# Altium PCB PCB1.PcbDoc
Units mm, origin at the board's own origin, x right, y up, seen from the top; angles counter-clockwise.
Board outline 143 x 38 mm, 2 copper layers (Component Side, Bottom Layer), stack 0.325 mm thick; 67 components, 41 nets, 195 pads, 0 vias.
Unrouted connection lines stored in the file: 3.
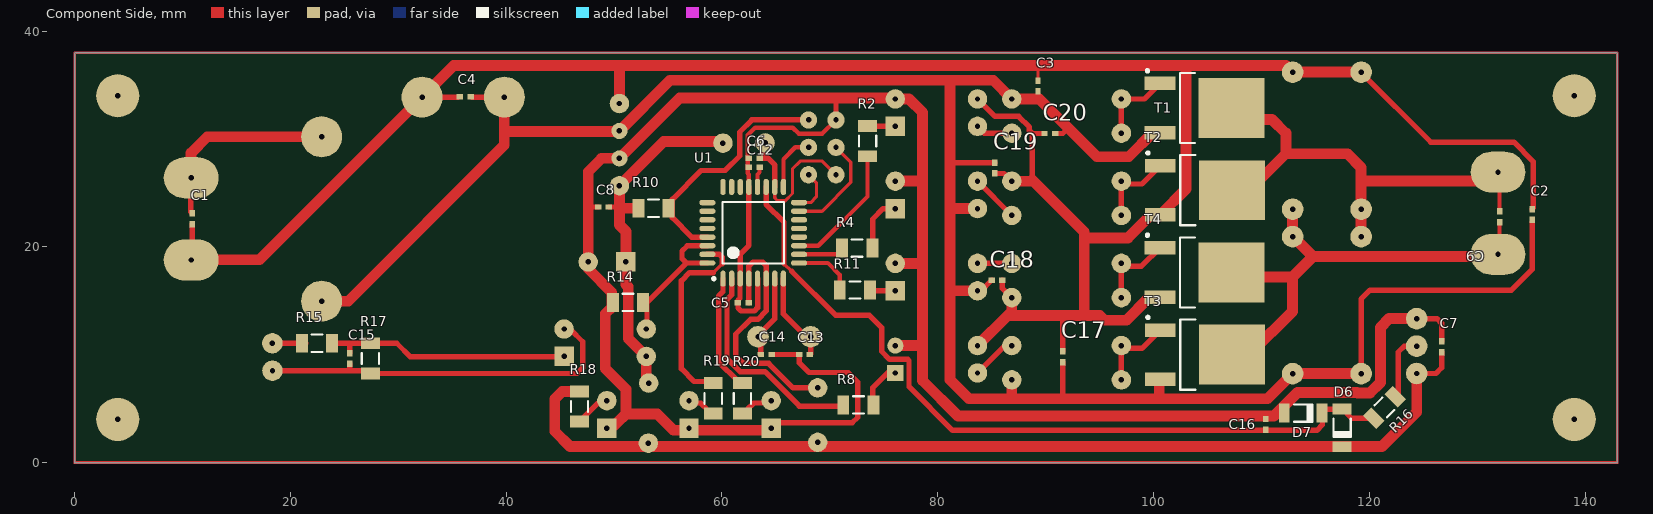
[diagram p0: Component Side view]
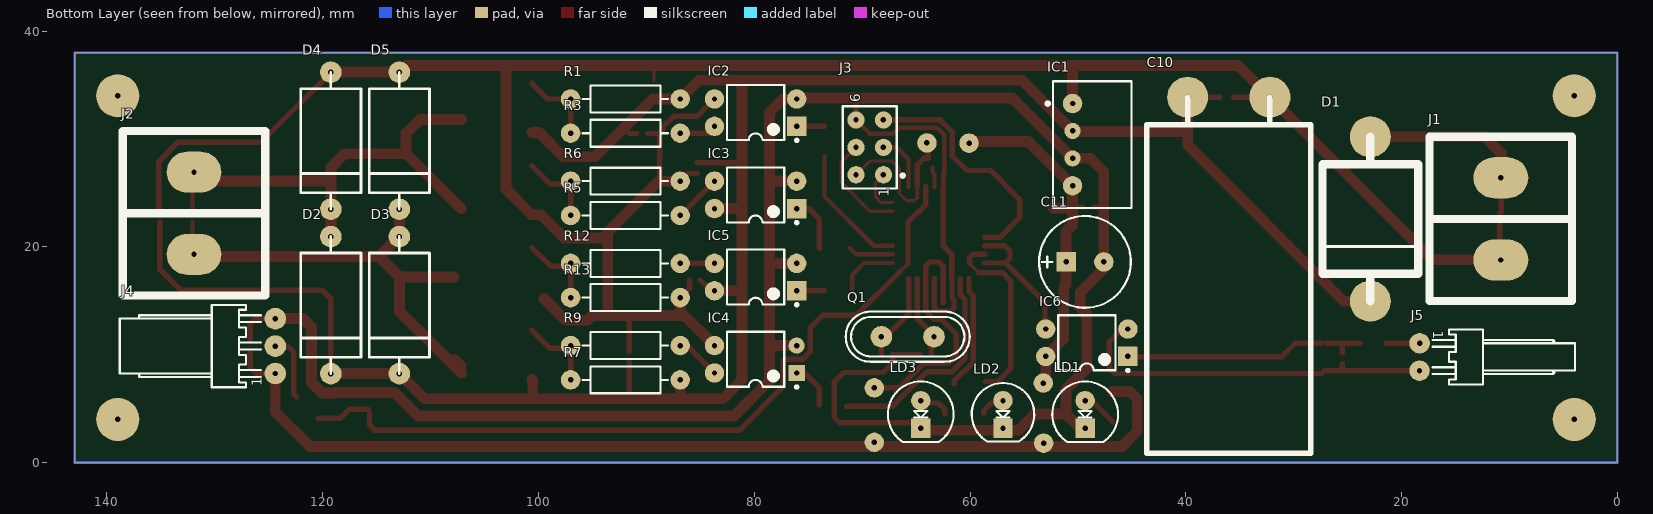
[diagram p1: Bottom Layer view, seen from below]
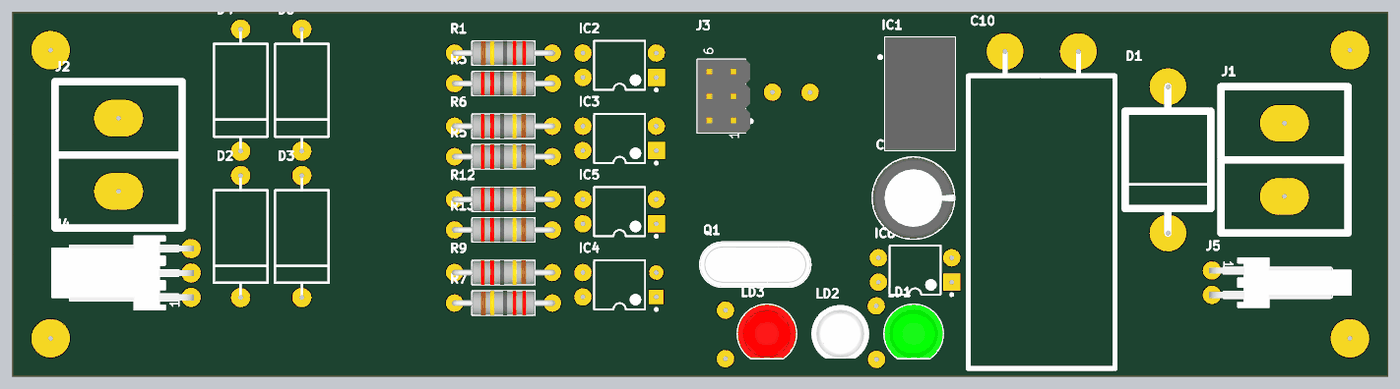
[diagram p2: 3D render of the assembled board from below, using the file's embedded part models]

## Layer stack, top to bottom
Top Solder: solder mask 0.0102, Solder Resist, Dk 3.5
Component Side: signal copper 0.0356
Dielectric 1: core 0.254, FR-4, Dk 4.2
Bottom Layer: signal copper 0.0356
Solder Side: solder mask 0.0102, Solder Resist, Dk 3.5

## Board outline
0,0 0,38 143,38 143,0

## Design rules (kind name [scope] priority, off if disabled: settings)
Clearance [All] p1: gap=0.27 ignorepadtopadclearanceinfootprint=FALSE
PolygonConnect [All] p1: connectstyle=Relief reliefconductorwidth=0.254 reliefentries=4 polygonreliefangle="90 Angle" airgapwidth=0.254
RoutingVias [All] p1: holewidth=0.711 width=1.27 viastyle="Through Hole" minholewidth=0.711 minwidth=1.27 maxholewidth=0.711 maxwidth=1.27
SolderMaskExpansion [All] p1: expansion=0.102
Width [All] p1: maxlimit=5.08 minlimit=0.254 preferedwidth=1.016
30 further rules are at their usual default settings.

## Components (designator, comment, footprint, x,y, rotation, side; value= is the part's Value field where it differs from the comment)
C1 "0.1" 0402 10.9,22.6 r90 top
C2 "0.1" 0402 135.1,23 r270 top
C3 "0.1" 0402 89.3,34.9 r270 top
C4 "0.1" 0402 36.2,33.9 r0 top
C5 "0.1" 0402 61.98,14.82 r0 top
C6 "0.1" 0402 63,28.22 r0 top
C7 "0.1" 0402 126.71,10.73 r270 top
C8 "0.1" 0402 49.03,23.69 r0 top
C9 "0.1" 0402 132.08,22.775 r90 top
C10 "25v 4700µ" Cap25v4700mkf 39.83,33.87 r270 bottom
C11 "10v 1000µ" CAPPR350W80D850H1300 49.35,18.6 r180 bottom
C12 "0.1" 0402 62.99,27.36 r0 top
C13 "22p" 0402 67.66,10.02 r0 top
C14 "22p" 0402 64.11,10.02 r180 top
C15 "10n" 0402 25.505,9.655 r90 top
C16 "0.1" 0402 110.39,3.54 r270 top
C17 "0.1" 0402 91.6,9.8 r270 top
C18 "0.1" 0402 85.5,16.9 r180 top
C19 "0.1" 0402 85.3,27.3 r90 top
C20 "0.1" 0402 90.4,30.5 r0 top
D1 "10A10" 10A10 22.9,14.96 r90 bottom
D2 "FR307" DO-27 119.25,8.245 r90 bottom
D3 "FR307" DO-27 112.9,8.245 r90 bottom
D4 "FR307" DO-27 119.25,23.485 r90 bottom
D5 "FR307" DO-27 112.9,23.485 r90 bottom
D6 "Device" DIOMELF3515N 117.49,3.21 r90 top
D7 "Device" DIOMELF3515N 113.88,4.58 r180 top
IC1 "Device" DCDC_TRACO_TME24 50.5,29.47 r270 bottom
IC2 "FL817" DIP-4#1 79.88,32.435 r0 bottom
IC3 "FL817" DIP-4#1 79.88,24.815 r0 bottom
IC4 "FL817" DIP-4#2 79.88,9.575 r0 bottom
IC5 "FL817" DIP-4#1 79.88,17.195 r0 bottom
IC6 "FL817" DIP-4#1 49.18,11.11 r0 bottom
J1 "Main Power" PwrCon 10.8,26.4 r270 bottom locked
J2 "Motor" PwrCon 131.935,26.92 r270 bottom locked
J3 "ISP Prog" COMATEL_389.0358.1.06.400 69.3,29.22 r90 bottom
J4 "Angle Sensor" MOLEX_22-05-7038 124.4,10.8 r90 bottom locked
J5 "Input Signal" MOLEX_22-05-7028 18.335,9.79 r270 bottom locked
LD1 "Color" LED_5MM_GREEN_1C-2A 49.33,4.47 r90 bottom
LD2 "Color" LED_VISHAY_TSAL6200 56.95,4.47 r90 bottom
LD3 "Color" LED_5MM_RED_1C-2A 64.57,4.47 r90 bottom
Q1 "8Mhz" XTAL_HC-49/U 65.78,11.67 r180 bottom
R1 "1k" RES1016-650X250 91.945,33.705 r180 bottom
R2 "1k" RESC3116X65N 73.5,29.8 r90 top
R3 "510om" RES1016-650X250 91.945,30.53 r0 bottom
R4 "1k" RESC3116X65N 72.54,19.88 r0 top
R5 "1k" RES1016-650X250 91.945,22.91 r0 bottom
R6 "1k" RES1016-650X250 91.945,26.085 r0 bottom
R7 "1k" RES1016-650X250 91.945,7.67 r180 bottom
R8 "1k" RESC3116X65N 72.65,5.35 r0 top
R9 "510om" RES1016-650X250 91.945,10.845 r0 bottom
R10 "10k" RESC3116X65N 53.66,23.57 r0 top
R11 "1k" RESC3116X65N 72.32,16 r0 top
R12 "1k" RES1016-650X250 91.945,18.465 r0 bottom
R13 "1k" RES1016-650X250 91.945,15.29 r0 bottom
R14 "1k" RESC3116X65N 51.3,14.85 r180 top
R15 "1k" RESC3116X65N 22.46,11.06 r0 top
R16 "1k" RESC3116X65N 121.42,5.1 r45 top
R17 "10k" RESC3116X65N 27.41,9.66 r90 top
R18 "1k" RESC3116X65N 46.8,5.2 r270 top
R19 "1k" RESC3116X65N 59.2,5.96 r270 top
R20 "1k" RESC3116X65N 61.9,5.96 r270 top
T1 "IRFR5305" TO228P991X239-3N-R546X521 104.745,32.865 r0 top
T2 "IRLR2905" TO228P991X239-3N-R546X521 104.785,25.245 r0 top
T3 "IRFR5305" TO228P991X239-3N-R546X521 104.785,10.005 r0 top
T4 "IRLR2905" TO228P991X239-3N-R546X521 104.745,17.625 r0 top
U1 "ATmega168PA-AU" 32A_M 62.9,21.3 r90 top

## Footprints (in the part's own frame and the unit in brackets; to place one, negate y for a bottom-side part, rotate by r counter-clockwise, add the part's x,y. Pads: shape width x height; smd on the part's side, far side on the other; paste and mask are expansions set on the pad)
10A10 [mm]
  round 3.81 hole 0.5: 1(0,0) 2(15.24,0)
  silkscreen extent 0,-4.45 15.24,4.44
32A_M [mm] "Thin QFP, 32-Leads, Body 7x7mm, Pitch 0.8mm, IPC Low Density"
  oval 1.5x0.5 smd: 1(-4.25,2.8) 2(-4.25,2) 3(-4.25,1.2) 4(-4.25,0.4) 5(-4.25,-0.4) 6(-4.25,-1.2) 7(-4.25,-2) 8(-4.25,-2.8) 17(4.25,-2.8) 18(4.25,-2) 19(4.25,-1.2) 20(4.25,-0.4) 21(4.25,0.4) 22(4.25,1.2) 23(4.25,2) 24(4.25,2.8)
  oval 0.5x1.5 smd: 9(-2.8,-4.25) 10(-2,-4.25) 11(-1.2,-4.25) 12(-0.4,-4.25) 13(0.4,-4.25) 14(1.2,-4.25) 15(2,-4.25) 16(2.8,-4.25) 25(2.8,4.25) 26(2,4.25) 27(1.2,4.25) 28(0.4,4.25) 29(-0.4,4.25) 30(-1.2,4.25) 31(-2,4.25) 32(-2.8,4.25)
  silkscreen extent -4.37,-2.85 2.85,3.77, body extent -3.5,-3.5 3.5,3.5, height 1.2
0402 [mm] "Chip Capacitor, Body 1.0x0.5mm, IPC High Density"
  rect 0.6x0.5 smd: 1(-0.5,0) 2(0.5,0)
  body extent -0.55,-0.3 0.55,0.3, height 1.3
Cap25v4700mkf [mm]
  round 3.81 hole 0.5: 1(0,0) 2(0,7.62)
  silkscreen extent 0,-3.81 33.02,11.43
CAPPR350W80D850H1300 [mm] "Capacitor, Radial, Pin spacing 3.5mm - Body Diameter 8.5mm x Body Height 13mm"
  rect 1.8x1.8 hole 0.5: 1(-1.75,0)
  round 1.8 hole 0.5: 2(1.75,0)
  silkscreen extent -4.25,-4.25 4.25,4.25, body extent -4.25,-4.25 4.25,4.25, height 13
COMATEL_389.0358.1.06.400 [mm] "6 Contacts - Pitch 2.54mm - Dual Row Straight Strip Header - Insulator 1.7mm"
  round 1.6 hole 0.5: 1(-2.54,-1.27) 2(-2.54,1.27) 3(0,-1.27) 4(0,1.27) 5(2.54,-1.27) 6(2.54,1.27)
  silkscreen extent -3.81,-3.2 3.81,2.5, body extent -3.81,-3 3.81,2.5, height 8
DCDC_TRACO_TME24 [mm] "TME Series , Body 11.75x7.25mm, SIP-4 Package"
  round 1.8 hole 0.5: 1(-3.81,0) 4(3.81,0)
  round 1.5 hole 0.5: 2(-1.27,0) 3(1.27,0)
  silkscreen extent -5.88,-2.45 5.88,5.45, body extent -5.87,-1.8 5.88,5.45, height 10.45
DIOMELF3515N [mm] "SOD80C, MELF Diode, 2-Leads, Body 3.5x1.5mm, IPC Medium Density"
  rect 1x1.75 smd: 1(-1.75,0) 2(1.75,0)
  silkscreen extent -0.85,-0.8 0.85,0.8, body extent -1.85,-0.8 1.85,0.8, height 1.6
DIP-4#1 [mm] "DIP; 4 Leads; Row Spacing 7.62 mm; Pitch 2.54 mm"
  rect 1.8x1.8 hole 0.5: 1(-3.81,1.27)
  round 1.8 hole 0.5: 2(-3.81,-1.27) 3(3.81,-1.27) 4(3.81,1.27)
  silkscreen extent -3.93,-2.55 2.65,2.69, body extent -3.15,-2.5 3.15,2.5, height 5.6
DIP-4#2 [mm] "DIP; 4 Leads; Row Spacing 7.62 mm; Pitch 2.54 mm"
  rect 1.5x1.5 hole 0.5: 1(-3.81,1.27)
  round 1.5 hole 0.5: 2(-3.81,-1.27)
  round 1.8 hole 0.5: 3(3.81,-1.27) 4(3.81,1.27)
  silkscreen extent -3.93,-2.55 2.65,2.69, body extent -3.15,-2.5 3.15,2.5, height 5.6
DO-27 [mm]
  round 2 hole 0.5: 1(0,0) 2(12.7,0)
  silkscreen extent 0,-2.79 12.7,2.79
LED_5MM_GREEN_1C-2A [mm] "LED, Green, Body Dia. 5.08mm, Pin spacing 2.54mm"
  rect 1.8x1.8 hole 0.5: 1(-1.27,0)
  round 1.8 hole 0.5: 2(1.27,0)
  silkscreen extent -2.56,-3.05 3.05,3.05, body extent -2.54,-3.05 3.05,3.05, height 14.34
LED_5MM_RED_1C-2A [mm] "LED, Red, Body Dia. 5.08mm, Pin spacing 2.54mm"
  rect 1.8x1.8 hole 0.5: 1(-1.27,0)
  round 1.8 hole 0.5: 2(1.27,0)
  silkscreen extent -2.56,-3.05 3.05,3.05, body extent -2.54,-3.05 3.05,3.05, height 14.34
LED_VISHAY_TSAL6200 [mm] "5mm Infrared Emitting Diode, VISHAY TSAL"
  rect 1.8x1.8 hole 0.5: 1(-1.27,0)
  round 1.8 hole 0.5: 2(1.27,0)
  silkscreen extent -2.5,-2.9 2.9,2.9, body extent -2.5,-2.9 2.9,2.9, height 13.7
MOLEX_22-05-7028 [mm] "2.54mm (.100\") Pitch KK® Wire-To-Board Header, Right Angle, With Friction Lock, 2 Circuits"
  round 1.9 hole 0.5: 1(-1.27,0.002) 2(1.27,-0.002)
  silkscreen extent -2.54,1.21 2.54,14.42, body extent -2.54,-0.32 2.54,14.42, height 5.84
MOLEX_22-05-7038 [mm] "2.54mm (.100\") Pitch KK® Wire-To-Board Header, Right Angle, With Friction Lock, 3 Circuits"
  round 2 hole 0.5: 1(-2.54,0) 2(0,-0.005) 3(2.54,0)
  silkscreen extent -3.81,1.31 3.81,14.42, body extent -3.81,-0.32 3.81,14.42, height 5.84
PwrCon [mm]
  oval 3.81x5.08 hole 0.5: 1(0,0) 2(7.62,0)
  silkscreen extent -3.81,-6.6 11.43,6.6
RES1016-650X250 [mm] "Resistor, Axial, Pad spacing 10.16 mm - Body Lengh 6.5mm X Body Diameter 2.5mm"
  round 1.8 hole 0.5: 1(-5.08,0) 2(5.08,0)
  silkscreen extent -3.95,-1.25 3.95,1.25, body extent -5.38,-1.27 5.38,1.26, height 2.51
RESC3116X65N [mm] "Chip Resistor, EIA 1206, Metric 3116, Body 3.1x1.55mm, IPC Medium Density"
  rect 1.1x1.75 smd: 1(-1.4,0) 2(1.4,0)
  silkscreen extent -0.5,-0.8 0.5,0.8, body extent -1.6,-0.85 1.6,0.85, height 0.65
TO228P991X239-3N-R546X521 [mm] "TO-252AA DPAK TO, 2.28mm pitch; 2 pin,9.905mm L X 6.095mm W X 2.39mm H body, IPC Medium Density"
  rect 2.85x1.25 smd: 1(-4.15,2.28) 2(-4.15,-2.28)
  rect 6.1x5.55 smd: 3(2.5,0)
  silkscreen extent -5.42,-3.25 -0.9,3.57, body extent -4.99,-3.27 4.95,3.27, height 2.28
XTAL_HC-49/U [mm] "HC-49/U Leaded Cristal, Body 11.05x4.8mm; Pitch 4.88mm"
  round 2 hole 0.5: 1(-2.44,0) 2(2.44,0)
  silkscreen extent -5.75,-2.33 5.75,2.33, body extent -5.75,-2.33 5.75,2.33, height 3.5

## Part data
C1 C2 C3 C4 C5 C6 C7 C8 C9 C12 C13 C14 C15 C16 C17 C18 C19 C20: library part "Capacitor - non polarized", "Non-polarised capacitor"
C10 C11: library part "Capacitor - polarized", "Polarised capacitor"
D1 D2 D3 D4 D5 D6 D7: library part Diode, "Diode"
IC1: library part DCDC_MURATA_MEE3, "1kV Isolated 3W Single Output DC-DC Converter"
IC2 IC3 IC4 IC5 IC6: library part "Optocoupler Type7", "Single Optocoupler"
J1: library part "Connector 2 Female"
J2: library part "Connector 2 Female", "Connector 2 Female"
J3: library part "Connector 6 Male", "Connector 6 Male"
J4: library part "Connector 3 Male", "Connector 3 Male"
J5: library part "Connector 2 Male", "Connector 2 Male"
LD1: library part "LED Green 1C 2A", "LED Green 1C 2A"
LD2: library part "LED Blue 1C 2A", "LED Blue 1C 2A"
LD3: library part "LED Red 1C 2A", "LED Red 1C 2A"
Q1: library part "Quartz Crystal", "Quartz Crystal"
R1 R2 R3 R4 R5 R6 R7 R8 R9 R10 R11 R12 R13 R14 R15 R16 R17 R18 R19 R20: library part Resistor, "Resistor"
T1 T3: library part "P-MOSFET-DZ 1G 2S 3D", "P-CHANNEL MOSFET WITH ZENER DIODE"
T2 T4: library part "N-MOSFET-DZ 1G 2S 3D", "N-CHANNEL MOSFET WITH ZENER DIODE"
U1: library part CMP-0095-00244-2, "8-bit AVR Microcontroller, 16KB Flash, 512 Bytes EEPROM, 1KB SRAM, 32-pin TQFP, Industrial Grade (-40°C to 85°C)", Code_JEDEC=MS-026-ABA, ComponentLink1Description="Manufacturer URL", ComponentLink1URL=http://www.atmel.com/, ComponentLink2Description="ATmega48A/48PA/88A/88PA/168A/168PA/328/328P Datasheet", ComponentLink2URL=http://www.atmel.com/dyn/resources/prod_documents/doc8271.pdf, ComponentLink3Description="ATmega48A/48PA/88A/88PA/168A/168PA/328/328P Summary", ComponentLink3URL=http://www.atmel.com/dyn/resources/prod_documents/8271S.pdf, DatasheetVersion="revD, May-2011", PackageDescription="32-Lead, 7x7x1.0 mm Body, 0.8mm Lead Pitch, Thin Profile Plastic Quad Flat Package (TQFP)", PackageReference=32A, PackageVersion="revC, Oct-2010", RevisionNote="DatasheetVersion & PackageVersion updated. URLs added."

## Free pads (board coordinates)
  round 1.8 hole 0.5: 0(68.88,6.93) 12(53.18,1.8) 12(53.214,7.37) 12(68.88,1.88) ""(60.09,29.61) ""(64,29.63)
  round 4 hole 0.5: 5(4,4) 5(139,4) 5(139,34) 6(4,34)

## Nets (pads, with @x,y where several pads share a name; then routed paths per layer and width w, separated by ;. In a path a pad name is that pad's centre, name@x,y a point inside that pad or via, vN(x,y) a via of type N, cw(c..) or ccw(c..) an arc to the next point about the centre after c; other vN are vias at no path point)
+5v: C5.2 C6.2 C7.2 C8.2 C11.1 D6.1 IC1.4 IC6.4 J3.2 J4.1 pad. pad.0 pad.12 R10.1 R18.1 U1.4 U1.6 U1.18 | length 167.4
  Component Side w0.3: U1.18 64.9,24.53 65.15,24.28 65.88,24.28 66.54,24.94 66.54,27.24 67.25,27.95 69.3,27.95 J3.2
  Component Side w0.5: C8.2 50.41,23.69 50.5,23.6 ; C5.2@62.5,14.82 U1.4 62.5,18.21 62.88,18.59 63.77,18.59 64.1,18.26 U1.6 64.1,14.056 63.324,13.28 62.66,13.28 61.28,11.9 61.28,9.93 62.01,9.2 64.33,9.2 66.6,6.93 pad.0 ; pad.@63.89,29.79 63.89,28.22 64.25,28.22 64.9,27.57 U1.18 ; J4.1 126.18,8.26 126.71,8.79 C7.2
  Component Side w1: R18.1 45.2,6.6 44.5,5.9 44.5,2.9 45.92,1.48 121.18,1.48 124.4,4.7 J4.1 ; R10.1 50.53,23.57 50.5,23.6 ; pad.12@53.214,7.37 52.99,7.51 IC6.4 51.32,11.51 51.32,16.294 51.1,16.514 C11.1 51.1,21.42 50.5,22.02 50.5,23.6 ; pad.@59.98,29.77 54.61,29.77 IC1.4 50.5,23.6
AnglSens: C16.2 D6.2 D7.1 R16.1 U1.19 | length 73.5
  Component Side w0.3: 65.75,18.448 66.47,17.728
  Component Side w0.5: U1.19 64.1,23.93 65.75,22.28 65.75,18.448 ; 66.47,17.728 70.558,13.64 73.67,13.64 74.8,12.51 74.8,10.319 75.544,9.575 77.035,9.575 77.04,9.57 77.21,9.57 77.34,9.44 77.34,7.04 81.39,2.99 115.14,2.99 115.67,3.52 115.67,4.76 115.87,4.96 117.51,4.96 118.36,4.11 R16.1
DGND: C5.1 C6.1 C7.1 C8.1 C11.2 C12.1 C13.1 C14.1 C16.1 D7.2 IC1.3 IC2.2 IC3.2 IC4.2 IC5.2 J3.6 J4.3 LD1.1 LD2.1 LD3.1 R14.2 U1.3 U1.5 U1.21 | length 220.7
  Component Side w0.4: U1.21 62.5,26.71 62.4,26.81 62.4,27.36 62.4,30.362 63.078,31.04 66.569,31.04 67.119,30.49 69.3,30.49 J3.6 ; 64.44,33.794 64.45,33.804 ; 69.25,33.804 69.3,33.754
  Component Side w0.5: 47.6,23.69 C8.1 ; LD1.1@49.689,3.085 49.689,2.981 LD1.1@49.69,2.582 ; 50.24,3.637 50.24,3.644 ; U1.21 62.5,20.125 61.7,19.325 U1.3 61.67,17.02 61.67,15.34 61.67,15.231 61.49,15.051 61.49,14.34 61.78,14.05 63.005,14.05 63.31,14.355 63.31,17.04 U1.5 ; LD3.1@64.53,2.98 65.255,3.705 72.075,3.705 72.59,4.19 72.59,7.47 71.71,8.35 68.08,8.35 67.16,9.27 C13.1 C14.1 ; J3.6 70.57,33.804 ; IC2.2@75.971,33.804 IC2.2 ; J4.3 126.28,13.34 126.71,12.91 C7.1
  Component Side w1: LD1.1@49.689,3.085 50.24,3.637 ; R14.2@49.795,14.645 49.795,15.765 47.6,17.96 C11.2 47.6,23.69 47.6,26.95 48.85,28.2 IC1.3 56.094,33.794 64.44,33.794 ; R14.2@49.92,14.52 49.19,13.79 49.19,8.71 51.1,6.8 51.1,4.504 ; 50.24,3.644 51.1,4.504 ; 64.45,33.804 69.25,33.804 70.57,33.804 IC2.2@75.971,33.804 ; LD3.1@64.53,3 55.504,3 54,4.504 51.1,4.504
  Component Side w1.016: IC4.2 78.545,10.845 78.61,10.91 ; IC5.2 78.61,18.465 ; IC3.2 78.61,26.085 ; IC2.2 77.34,33.705 78.61,32.435 78.61,26.085 ; J4.3 121.84,13.34 121.028,12.528 121.028,7.418 120.05,6.44 118.91,6.44 118.85,6.5 113.333,6.5 111.163,4.33 81.87,4.33 78.61,7.59 78.61,10.91 ; 78.61,10.91 78.61,18.465 ; 78.61,18.465 78.61,26.085
MISO: J3.1 U1.16 | length 4.2
  Component Side w0.3: U1.16 68.23,24.1 68.76,24.63 68.76,25.95 J3.1
MOSI: J3.4 U1.15 | length 9.7
  Component Side w0.3: U1.15 69.28,23.3 71.95,25.97 71.95,27.84 J3.4
MP1: C9.2 D2.2 D4.1 J2.1 T1.3 T2.3 | length 43.7
  Component Side w0.381: C9.2@132.08,23.337 J2.1@132.08,26.72
  Component Side w1.016: T1.3@107.145,31.8 110.995,31.8 112.265,30.53 112.265,28.625 ; T2.3@107.185,23.545 112.265,28.625 ; D2.2 D4.1 119.25,26.085 ; J2.1@130.68,26.72 130.045,26.085 119.25,26.085 ; 112.265,28.625 117.98,28.625 119.25,27.355 119.25,26.085
MP1EN: R2.1 U1.11 | length 12
  Component Side w0.4: U1.11 68.93,20.1 73.5,24.67 R2.1
MP1PWM: R4.1 U1.10 | length 4.2
  Component Side w0.4: U1.10 70.56,19.3 R4.1
MP2: C9.1 D3.2 D5.1 J2.2 T3.3 T4.3 | length 44.3
  Component Side w0.381: J2.2@132.08,19.1 C9.1
  Component Side w1.016: T3.3@107.145,8.305 110.955,12.115 ; T3.3@107.185,8.94 T3.3@107.82,9.575 ; T4.3@107.82,17.195 112.9,17.195 ; 110.995,12.115 112.9,14.02 112.9,17.195 ; D3.2 D3.2@112.9,21.005 ; D5.1@112.9,23.545 D5.1 D3.2@112.9,21.005 ; J2.2@130.68,19.1 114.805,19.1 ; 112.9,17.195 114.805,19.1 ; D3.2@112.9,21.005 114.805,19.1
MP2EN: R8.1 U1.2 | length 20.4
  Component Side w0.5: U1.2 60.9,15.55 60.47,15.12 60.47,9.639 61.679,8.43 63.992,8.43 67.182,5.24 R8.1@71.43,5.24
MP2PWM: R11.1 U1.9 | length 5.6
  Component Side w0.4: U1.9 69.82,18.5 70.92,17.4 R11.1
NetC12_2: C12.2 U1.20 | length 1.9
  Component Side w0.4: U1.20 63.3,26.71 63.49,26.9 C12.2
NetC13_2: C13.2 Q1.1 U1.8 | length 7.9
  Component Side w0.5: U1.8 65.7,13.78 Q1.1@67.765,11.715 ; C13.2 68.22,10.08 Q1.1
NetC14_2: C14.2 Q1.2 U1.7 | length 7.4
  Component Side w0.5: Q1.2 63.61,11.4 C14.2 ; Q1.2@63.51,11.95 64.9,13.34 U1.7
NetC15_1: C15.1 IC6.2 J5.2 R17.1 | length 34
  Component Side w0.5: J5.2@18.525,8.52 25.505,8.52 ; C15.1 25.505,8.52 ; IC6.2@45.49,12.31 45.99,12.31 47.1,11.2 47.1,8.8 46.56,8.26 R17.1 27.15,8.52 25.505,8.52
NetC15_2: C15.2 IC6.1 R15.2 R17.2 | length 22.6
  Component Side w0.5: R15.2 25.505,11.06 ; C15.2 25.505,11.06 ; R17.2@26.905,11.06 25.505,11.06 ; R17.2 29.86,11.06 31.12,9.8 IC6.1@45.49,9.8
NetIC2_1: IC2.1 R2.2 | length 2.5
  Component Side w0.5: R2.2@73.53,31.165 IC2.1
NetIC2_4: IC2.4 R3.1 | length 3.4
  Component Side w0.5: IC2.4 84.325,30.53 R3.1
NetIC3_1: IC3.1 R4.2 | length 5.2
  Component Side w0.5: R4.2 73.98,19.92 73.98,22.58 74.945,23.545 IC3.1
NetIC3_3: IC3.3 R5.1 | length 4.5
  Component Side w0.5: IC3.3 R5.1
NetIC4_1: IC4.1 R8.2 | length 3.6
  Component Side w0.5: R8.2@73.97,5.35 73.97,6.92 IC4.1@75.385,8.335
NetIC4_4: IC4.4 R9.1 | length 4.2
  Component Side w0.5: IC4.4 86.23,10.845 R9.1
NetIC5_1: IC5.1 R11.2 | length 2.5
  Component Side w0.5: R11.2@73.53,15.925 IC5.1
NetIC5_3: IC5.3 R12.1 | length 3.2
  Component Side w0.5: IC5.3 R12.1
NetJ4_2: J4.2 R16.2 | length 6.2
  Component Side w0.5: R16.2 122.69,6.37 122.69,10.23 123.26,10.8 J4.2
NetJ5_1: J5.1 R15.1 | length 2.9
  Component Side w0.5: J5.1@18.52,11.06 R15.1 R15.1@21.435,11.06
NetLD1_2: LD1.2 R18.2 | length 3.2
  Component Side w0.5: R18.2 48.52,5.52 LD1.2@49.29,5.52
NetLD2_2: LD2.2 R19.2 | length 2.4
  Component Side w0.5: LD2.2@56.91,5.52 58.03,5.52 58.73,4.82 R19.2@58.73,4.57
NetLD3_2: LD3.2 R20.2 | length 2.8
  Component Side w0.5: R20.2@62.34,4.54 62.34,4.9 62.96,5.52 LD3.2@64.53,5.52
NetR1_1: R1.1 R3.2 T1.1 | length 8
  Component Side w0.5: R3.2@97.025,29.895 R3.2 R1.1 99.155,33.705 T1.1
NetR5_2: R5.2 R6.2 T2.1 | length 7.6
  Component Side w0.5: R5.2 R6.2 97.285,25.825 98.935,25.825 T2.1
NetR7_1: R7.1 R9.2 T3.1 | length 7.6
  Component Side w0.5: R7.1 R9.2 97.285,10.585 98.935,10.585 T3.1
NetR12_2: R12.2 R13.2 T4.1 | length 7.6
  Component Side w0.5: R13.2 R12.2 97.285,18.205 98.895,18.205 T4.1
NetR19_1: R19.1 U1.31 | length 17.5
  Component Side w0.3: 59.198,17.6 60.02,18.422
  Component Side w0.5: R19.1@58.58,7.52 57.428,7.52 56.24,8.708 56.24,16.84 57,17.6 59.198,17.6 ; U1.31 59.76,19.3 60.02,19.04 60.02,18.422
NetR20_1: R20.1 U1.1 | length 10.6
  Component Side w0.5: U1.1 60.1,15.839 59.7,15.439 59.7,9.32 61.475,7.545 R20.1@61.475,7.325
PGND: C1.1 C2.1 C3.1 C4.1 C10.2 C17.1 C18.1 C19.1 C20.1 D4.2 D5.2 IC1.1 IC2.3 IC4.3 J1.2 R6.1 R13.1 T2.2 T4.2 | length 228.8
  Component Side w0.3: 89.15,36.8 89.3,36.65 C3.1
  Component Side w0.5: J1.2@10.77,18.815 10.9,18.945 C1.1 ; C10.2 C4.1@35.57,33.87 ; IC2.3 85.311,32.084 87.509,32.084 88.496,31.096 88.496,30.774 88.77,30.5 ; C19.1 86.15,26.8 R6.1 ; C18.1 86,16.155 R13.1 ; 88.77,26.2 88.77,30.5 ; C20.1 88.77,30.5 ; C17.1 91.6,13.645 ; D4.2 119.25,36.15 125.7,29.7 133.4,29.7 135.2,27.9 135.2,23.6 C2.1
  Component Side w1: J1.2@11.5,18.8 17.14,18.8 C10.2 35.14,36.8 50.5,36.8 ; IC1.1@50.5,33.72 50.5,36.8 ; IC4.3 86.49,13.645 ; R13.1 86.865,14.02 86.49,13.645 ; R6.1 88.655,26.085 88.77,26.2 93.59,21.38 93.59,20.83 ; T4.2@99.5,15.2 97.5,13.2 95.456,13.2 95.011,13.645 93.59,13.645 ; D5.2 112.285,36.8 103.02,36.8 ; 50.5,36.8 89.15,36.8 103.02,36.8 ; 86.49,13.645 91.6,13.645 93.59,13.645 ; 93.59,13.645 93.59,20.83 ; 93.59,20.83 97.63,20.83 99.765,22.965 T2.2 103.02,25.35 103.02,36.8
  Component Side w1.016: D5.2 D4.2
RESET: J3.5 R10.2 U1.29 | length 22.7
  Component Side w0.5: R10.2@55.39,23.4 R10.2@55.4,23.41 ; U1.29 57.2,20.9 55.4,22.7 R10.2@55.4,23.41 ; J3.5 62.78,31.76 61.65,30.63 61.65,28.43 60.29,27.07 58.07,27.07 55.4,24.4 R10.2@55.4,23.41
SCK: J3.3 U1.17 | length 5.4
  Component Side w0.4: U1.17 65.7,28.12 66.8,29.22 J3.3
SigIn: IC6.3 R14.1 U1.30 U1.32 | length 13.4
  Component Side w0.5: IC6.3 53.05,12.44 53.05,14.85 56.7,18.5 ; U1.32 56.7,18.5 ; U1.30 56.8,20.1 56.3,19.6 56.3,18.9 56.7,18.5
Vcc: C2.2 C3.2 C4.2 C10.1 C17.2 C18.2 C19.2 C20.2 D1.1 D2.1 D3.1 IC1.2 IC3.4 IC5.4 R1.2 R7.2 T1.2 T3.2 | length 212.2
  Component Side w0.5: C4.2@36.83,33.87 C10.1 ; 81.15,27.8 C19.2 ; IC5.4 84.025,15.925 C18.2 ; C20.2 91.59,30.5 92.1,31.01 ; 91.395,5.92 91.6,6.125 C17.2 ; D2.1 119.25,15.15 120.079,15.979 133.179,15.979 135.1,17.9 C2.2@135.1,22.3
  Component Side w1: D1.1 25.365,14.96 39.83,29.425 39.83,30.7 ; C10.1 39.83,30.7 ; IC5.4 81.15,15.925 ; IC3.4 81.15,23.545 ; R7.2 86.865,5.92 ; T1.2 99.945,30.585 97.71,28.35 94.76,28.35 92.1,31.01 89.405,33.705 R1.2 85.14,35.43 81.15,35.43 ; T3.2 100.535,7.625 100.535,5.92 ; D3.1 110.575,5.92 100.535,5.92 ; 39.83,30.7 50.02,30.7 50.06,30.74 IC1.2 55.19,35.43 81.15,35.43 ; 81.15,15.925 81.15,7.67 82.9,5.92 86.865,5.92 ; 81.15,15.925 81.15,23.545 ; 81.15,23.545 81.15,27.8 81.15,35.43 ; 86.865,5.92 91.395,5.92 100.535,5.92
  Component Side w1.016: D3.1 D2.1
Vin: C1.2 D1.2 J1.1 | length 18.4
  Component Side w0.5: J1.1@10.77,26.435 10.77,23.23 C1.2
  Component Side w1: J1.1 10.8,28.7 12.3,30.2 D1.2
pads on no net: U1.12 U1.13 U1.14 U1.22 U1.23 U1.24 U1.25 U1.26 U1.27 U1.28

## Other copper
Multi-Layer:
  the board outline again, w0.254

## Text inside footprints (layer, text, board x,y; h text height)
IC1: Mechanical 14 "1" at 51.908,32.905 h0.9; Mechanical 14 "4" at 52.033,25.285 h0.9; Mechanical 14 "-Vin" at 49.23,32.905 h0.9; Mechanical 14 "+Vin" at 49.23,30.365 h0.9; Mechanical 14 "-Vout" at 49.23,27.825 h0.9; Mechanical 14 "+Vout" at 49.23,25.285 h0.9
J3: Bottom Overlay "1" at 67.522,24.648 h0.9 r270; Bottom Overlay "6" at 70.189,33.411 h0.9 r270
J4: Bottom Overlay "1" at 125.668,7.087 h0.9 r270; Mechanical 14 "1" at 125.668,7.087 h0.9 r270
J5: Bottom Overlay "1" at 17.065,12.232 h0.9 r90; Mechanical 14 "1" at 17.065,12.232 h0.9 r90
LD2: Mechanical 8 "C" at 57.95,2.819 h0.9 r270; Mechanical 8 "A" at 57.95,5.383 h0.9 r270